# EAGLE board PWM_controller_board (EAGLE 9.6.2)
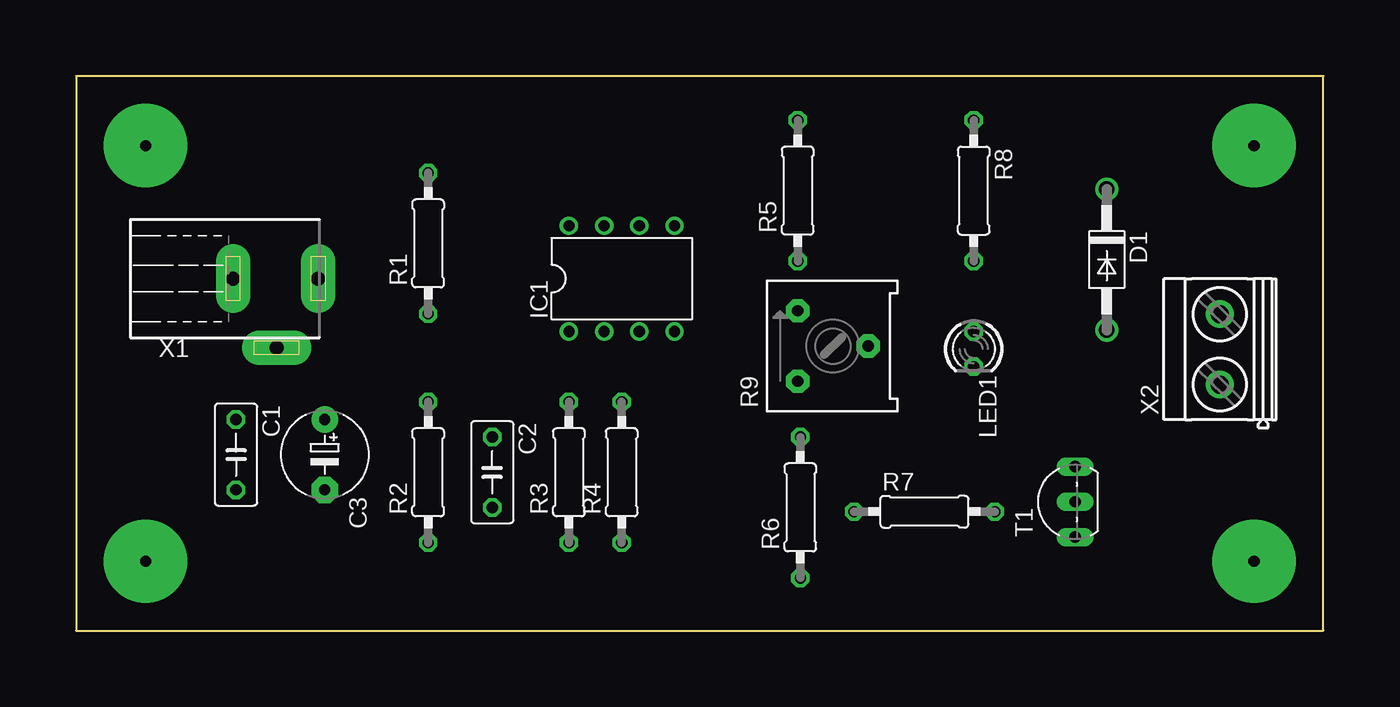
[diagram p0: board, top side]
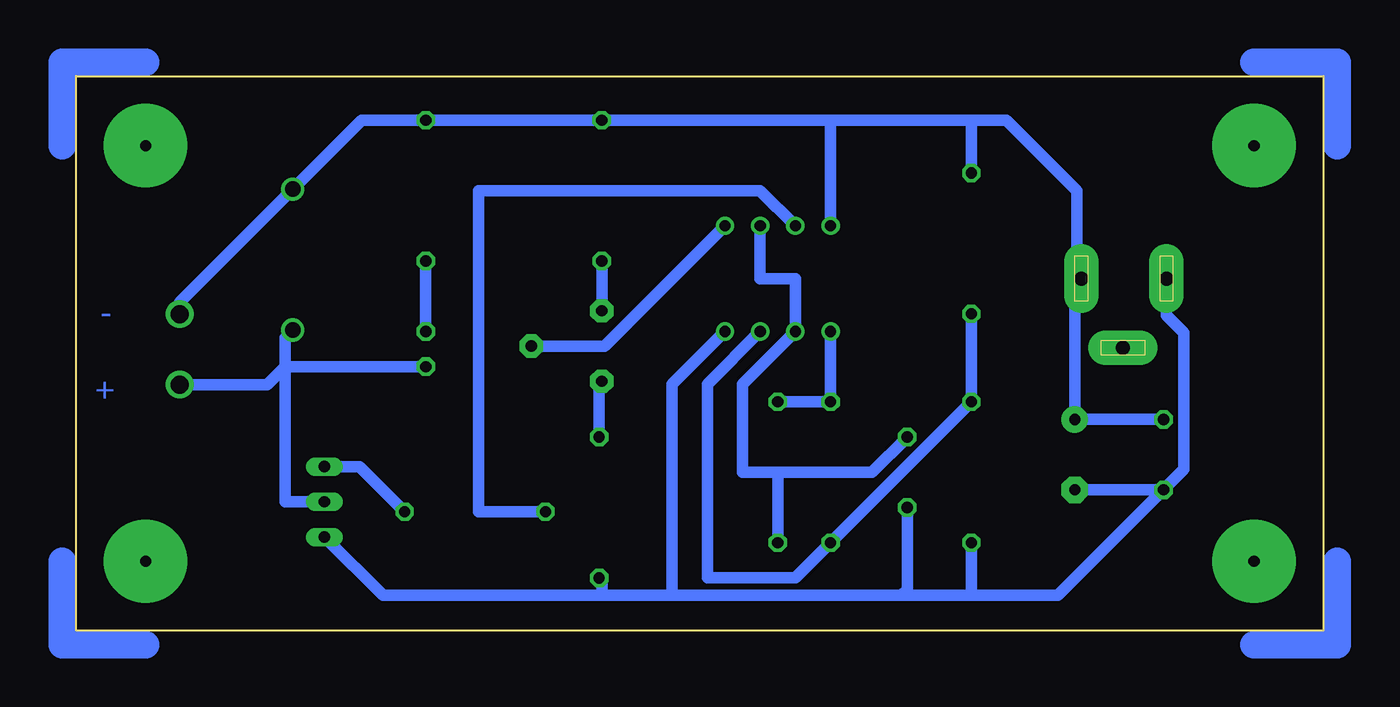
[diagram p1: board, bottom side, seen from below]

Size 90 x 40 mm. Coordinates in mm from the lower left corner, seen from the top.
Outline: 0,0 90,0 90,40 0,40 0,0
Copper layers (1*16): Top 0.035mm / dielectric 1.5mm / Bottom 0.035mm
Design rules "HTL-KLU-DRC": minimum track width 16mil, minimum drill 31mil, track to track 16mil, track to pad 16mil, pad to pad 16mil, via to via 16mil, smd to smd 12mil, copper to edge 40mil, drill to drill 16mil, minimum pad ring 10mil, minimum via ring 16mil, stop-mask expansion 4mil, vias tented up to drill 0mil, thermal gap 20mil

## Footprints (pad centres in the part's own frame; a part is rotated, then mirrored left to right if it is on the bottom)
C050-030X075 = drill 0.813 octagon: 1 -2.54,0; 2 2.54,0
E5-6 = drill 0.813 pad 1.905: + -2.54,0 | drill 0.813 pad 1.905 octagon: - 2.54,0
DO41-10 = drill 1.118: A 5.08,0; C -5.08,0
DIL08 = drill 0.813 pad 1.27: 1 -3.81,-3.81; 2 -1.27,-3.81; 3 1.27,-3.81; 4 3.81,-3.81; 5 3.81,3.81; 6 1.27,3.81; 7 -1.27,3.81; 8 -3.81,3.81
LED3MM = drill 0.813 octagon: A -1.27,0; K 1.27,0
0207/10 = drill 0.813 octagon: 1 -5.08,0; 2 5.08,0
3386F = drill 0.813 pad 1.676 octagon: 1 -2.54,2.54; 2 0,-2.54; 3 2.54,2.54
TO92-ECB = drill 0.813 long: B 2.54,0; C 0,0; E -2.54,0
733980-62 = drill 1 pad 2.5 long: 1 0,8.57; 2 0,2.42; 3 5,5.57
MKDSN1,5/2-5,08 = drill 1.3 pad 2: 1 -2.561,0.025; 2 2.519,0.025

## Placement (x,y rotation side)
C1  100n  [C050-030X075]  11.53,12.7 270 top
C2  10n  [C050-030X075]  30.02,11.43 270 top
C3  100u  [E5-6]  17.93,12.7 270 top
D1  1N4004  [DO41-10]  74.37,26.77 270 top
IC1  LM358N  [DIL08]  39.37,25.4 0 top
LED1  [LED3MM]  64.77,20.32 270 top
R1  10k  [0207/10]  25.4,27.94 90 top
R2  10kk  [0207/10]  25.4,11.43 90 top
R3  10k  [0207/10]  35.56,11.43 90 top
R4  10k  [0207/10]  39.37,11.43 90 top
R5  3k9  [0207/10]  52.07,31.75 90 top
R6  3k9  [0207/10]  52.26,8.89 90 top
R7  [0207/10]  61.21,8.59 0 top
R8  [0207/10]  64.77,31.75 270 top
R9  [3386F]  54.61,20.54 90 top
T1  [TO92-ECB]  72.09,9.3 90 top
X1  [733980-62]  8.89,25.4 270 top
X2  MKDSN1,5/2-5,08  [MKDSN1,5/2-5,08]  82.55,20.32 90 top

## Library data of the parts
C1-C3 = rcl; SPICEPREFIX: C
D1 = diode
IC1 = linear
LED1 = led
R1-R8 = rcl; SPICEPREFIX: R
R9 = bourns
T1 = transistor
X1 = con-conrad
X2 = con-phoenix-508

## Nets
+12V: C1.1 C3.+ D1.C IC1.8 R1.2 R5.2 R8.1 X1.1 X2.2
GND: C1.2 C2.2 C3.- IC1.4 R2.1 R6.1 T1.E X1.2
N$1: IC1.3 R1.1 R2.2 R3.1
N$2: C2.1 IC1.2 IC1.6 R4.1
N$3: IC1.1 R3.2 R4.2
N$4: R6.2 R9.1
N$5: IC1.7 R7.1
N$6: R7.2 T1.B
N$7: D1.A LED1.K T1.C X2.1
N$8: IC1.5 R9.2
N$9: R5.1 R9.3
N$10: LED1.A R8.2

## Tracks (layer width: path | path; a pad name or v marks a point on that pad's centre or on a via)
+12V
  Bottom 0.813: C1.1 C3.+ 17.93,24.93 X1.1 17.78,25.72 17.78,31.75 22.86,36.83 25.4,36.83 | 25.4,36.83 35.56,36.83 | 35.56,36.83 R5.2 R8.1 69.39,36.83 D1.C 82.53,23.7 X2.2 | R1.2 25.4,36.83 | IC1.8 35.56,36.83
GND
  Bottom 0.813: C1.2 C3.- | X1.2 11.31,22.74 10.06,21.49 10.06,11.63 C1.2 | C1.2 19.15,2.54 25.4,2.54 | T1.E 67.87,2.54 52.07,2.54 | 25.4,2.54 30.48,2.54 | 30.48,2.54 46.99,2.54 | 46.99,2.54 52.07,2.54 | R2.1 25.4,2.54 | C2.2 30.02,3 30.48,2.54 | R6.1 52.07,3.62 52.07,2.54 | IC1.4 46.99,17.78 46.99,2.54
N$1
  Bottom 0.813: R1.1 R2.2 29.41,12.5 | 29.41,12.5 R3.1 38.1,3.81 44.45,3.81 44.45,17.78 IC1.3 | 29.41,12.5
N$2
  Bottom 0.813: IC1.6 40.64,25.4 38.1,25.4 IC1.2 41.91,17.78 41.91,11.43 39.37,11.43 | R4.1 39.37,11.43 | C2.1 32.56,11.43 39.37,11.43
N$3
  Bottom 0.813: IC1.1 R3.2 R4.2
N$4
  Bottom 0.813: R9.1 52.26,17.8 R6.2
N$5
  Bottom 0.813: R7.1 60.96,8.59 60.96,31.75 40.64,31.75 IC1.7
N$6
  Bottom 0.813: R7.2 69.55,11.84 T1.B
N$7
  Bottom 0.813: T1.C 74.93,9.3 74.93,19.05 | 74.93,19.05 74.93,21.13 D1.A | LED1.K 74.93,19.05 | 74.93,19.05 76.22,17.76 X2.1
N$8
  Bottom 0.813: R9.2 51.85,20.54 IC1.5
N$9
  Bottom 0.813: R9.3 R5.1
N$10
  Bottom 0.813: R8.2 | R8.2 LED1.A
N$11  (via drill 0.8 pad 6)
  other vias: 5,35
N$12  (via drill 0.8 pad 6)
  other vias: 85,35
N$13  (via drill 0.8 pad 6)
  other vias: 85,5
N$14  (via drill 0.8 pad 6)
  other vias: 5,5
N$15
  Bottom 2: -1,35 -1,41 5,41
N$16
  Bottom 2: 85,41 91,41 91,35
N$17
  Bottom 2: 91,5 91,-1 85,-1
N$18
  Bottom 2: 5,-1 -1,-1 -1,5

## Text on the board
Bottom: - | +